# EAGLE board ais_rx1_v1 (EAGLE 7.3.0)
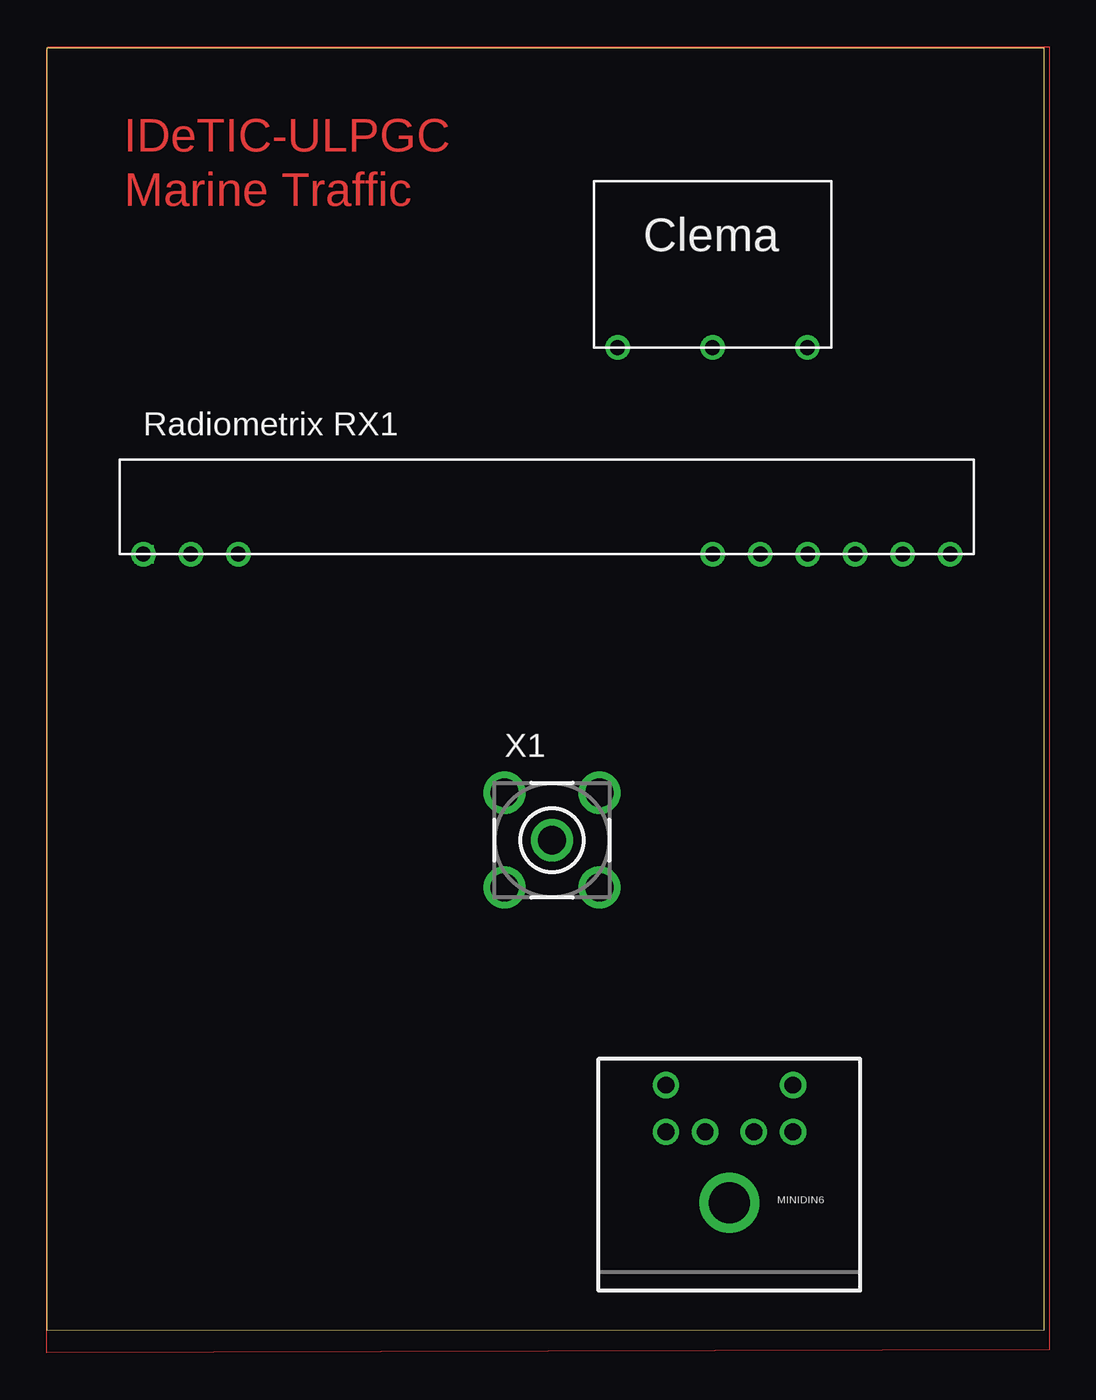
[diagram p0: board, top side]
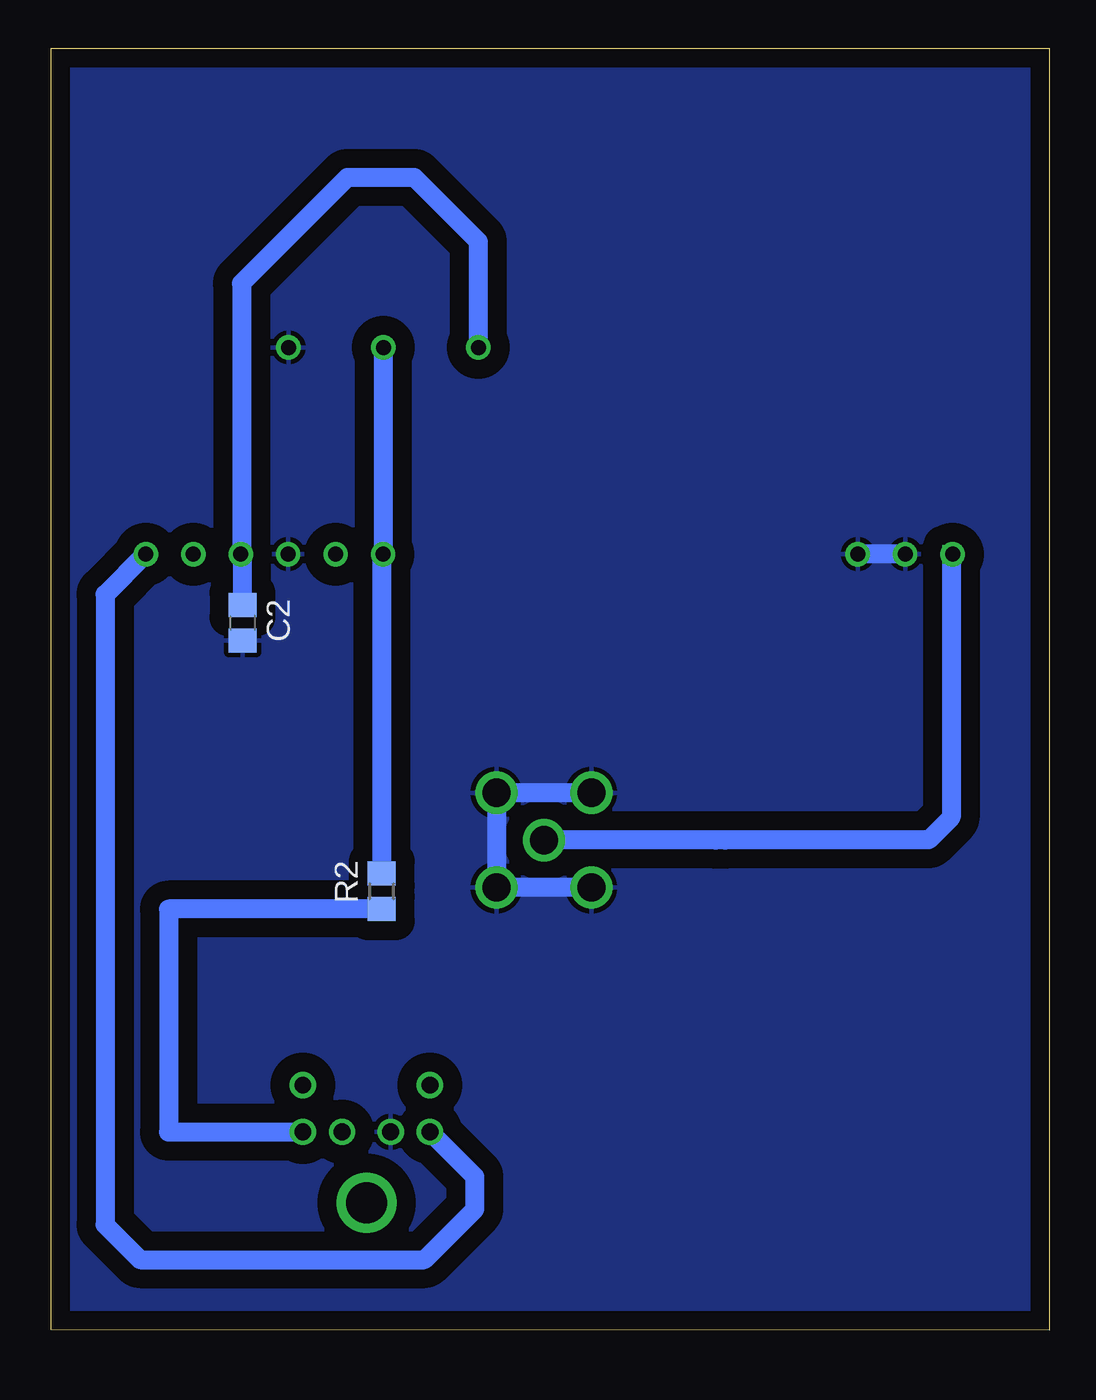
[diagram p1: board, bottom side, seen from below]

Size 53.4 x 68.61 mm. Coordinates in mm from the lower left corner, seen from the top.
Outline: 0,0 53.4,0.01 53.4,68.61 0,68.6 0,0
Copper layers (1*16): Top 0.035mm / dielectric 1.5mm / Bottom 0.035mm
Design rules "default": minimum track width 10mil, minimum drill 24mil, track to track 8mil, track to pad 8mil, pad to pad 8mil, via to via 8mil, smd to smd 8mil, copper to edge 40mil, drill to drill 8mil, minimum pad ring 10mil, minimum via ring 8mil, stop-mask expansion 4mil, vias tented up to drill 0mil, thermal gap 10mil

## Footprints (pad centres in the part's own frame; a part is rotated, then mirrored left to right if it is on the bottom)
C0805 = smd 1.3 x 1.5: 1 -0.95,0; 2 0.95,0
CLEMA = drill 0.8 pad 1.27: EN 5.08,0; GND 10.16,0; VCC 0,0
MINI-DIN6 = drill 0.9: 1 -1.3,-8.5; 2 1.3,-8.5; 3 -3.4,-8.5; 4 3.4,-8.5; 5 -3.4,-11; 6 3.4,-11 | drill 2.2: P$1 0,-4.7
R0805 = smd 1.3 x 1.5: 1 -0.95,0; 2 0.95,0
RX1 = drill 0.8: 1 0,0; 2 2.54,0; 3 5.08,0; 4 30.48,0; 5 33.02,0; 6 35.56,0; 7 38.1,0; 8 40.64,0; 9 43.18,0
LTI-SASF54GT = drill 1.5 pad 2.2: 1 0,0; 2 -2.54,2.54; 3 2.54,2.54; 4 2.54,-2.54; 5 -2.54,-2.54

## Placement (x,y rotation side)
C2  100 nF  [C0805]  43.17,37.85 270 bottom
CLEMAPCB1  CLEMA  [CLEMA]  30.55,52.59 0 top
MINIDIN6  MINI-DIN6PTH  [MINI-DIN6]  36.54,2.11 180 top
R2  1 KOhm  [R0805]  35.72,23.49 90 bottom
RX1  RX1  [RX1]  5.17,41.52 0 top
X1  LTI-SASF54GT  [LTI-SASF54GT]  27.04,26.22 0 top

## Library data of the parts
C2 = rcl
CLEMAPCB1 = clema_pcb
MINIDIN6 = SparkFun-Connectors
R2 = resistor
RX1 = radiometrix_rx1
X1 = con-coax; OC_FARNELL: unknown; OC_NEWARK: unknown

## Nets
+5V: C2.1 CLEMAPCB1.VCC RX1.7
GND: C2.2 CLEMAPCB1.GND MINIDIN6.2 RX1.2 RX1.3 RX1.6 X1.2 X1.3 X1.4 X1.5
N$2: RX1.1 X1.1
N$3: CLEMAPCB1.EN R2.2 RX1.4
N$5: MINIDIN6.4 RX1.9
N$7: MINIDIN6.3 R2.1
RSSI: RX1.5

## Tracks (layer width: path | path; a pad name or v marks a point on that pad's centre or on a via)
+5V
  Bottom 1.016: CLEMAPCB1.VCC 30.55,58.26 33.97,61.68 37.57,61.68 43.23,56.02 43.23,41.56 RX1.7 43.17,41.42 C2.1
GND
  Bottom 1.016: X1.2 X1.3 X1.4 X1.5 | RX1.2 RX1.3
  pour Bottom (isolate 1.016): 0,68.76 53.4,68.76 53.4,0.01 0,0.01
N$1
  Top 0: 0.09,68.68 53.65,68.68 53.65,-1.04 0,-1.21 0,68.51 0.09,68.68
N$2  (via drill 0.6)
  Top 0.406: RX1.1 v5.21,41.52
  Bottom 0.406: X1.1
  Bottom 1.016: 17.34,26.23 17.86,26.23 | 17.86,26.23 X1.1 | 17.86,26.23 17.85,26.24 6.45,26.24 5.25,27.44 5.25,41.52 RX1.1
N$3
  Bottom 0.406: CLEMAPCB1.EN 35.65,52.59 | RX1.4 35.72,41.52
  Bottom 1.016: 35.65,52.59 RX1.4 | 35.72,41.52 R2.2
N$5
  Bottom 1.016: RX1.9 48.38,41.52 50.53,39.37 50.53,5.65 48.65,3.77 33.44,3.77 30.74,6.47 30.74,8.21 MINIDIN6.4
N$7
  Bottom 0.406: MINIDIN6.3
  Bottom 1.016: R2.1 47.13,22.54 47.13,10.6 MINIDIN6.3

## Text on the board
Top: IDeTIC-ULPGC | Marine Traffic
tNames: Clema